# Altium PCB OpenPilot Atom.PcbDoc
Units mil, origin at the board's own origin, x right, y up, seen from the top; angles counter-clockwise.
Board outline 1181.1 x 665 mil, 4 copper layers (Top Layer, GND, PWR, Bottom Layer), stack 89.2 mil thick; 47 components, 47 nets, 207 pads, 69 vias.
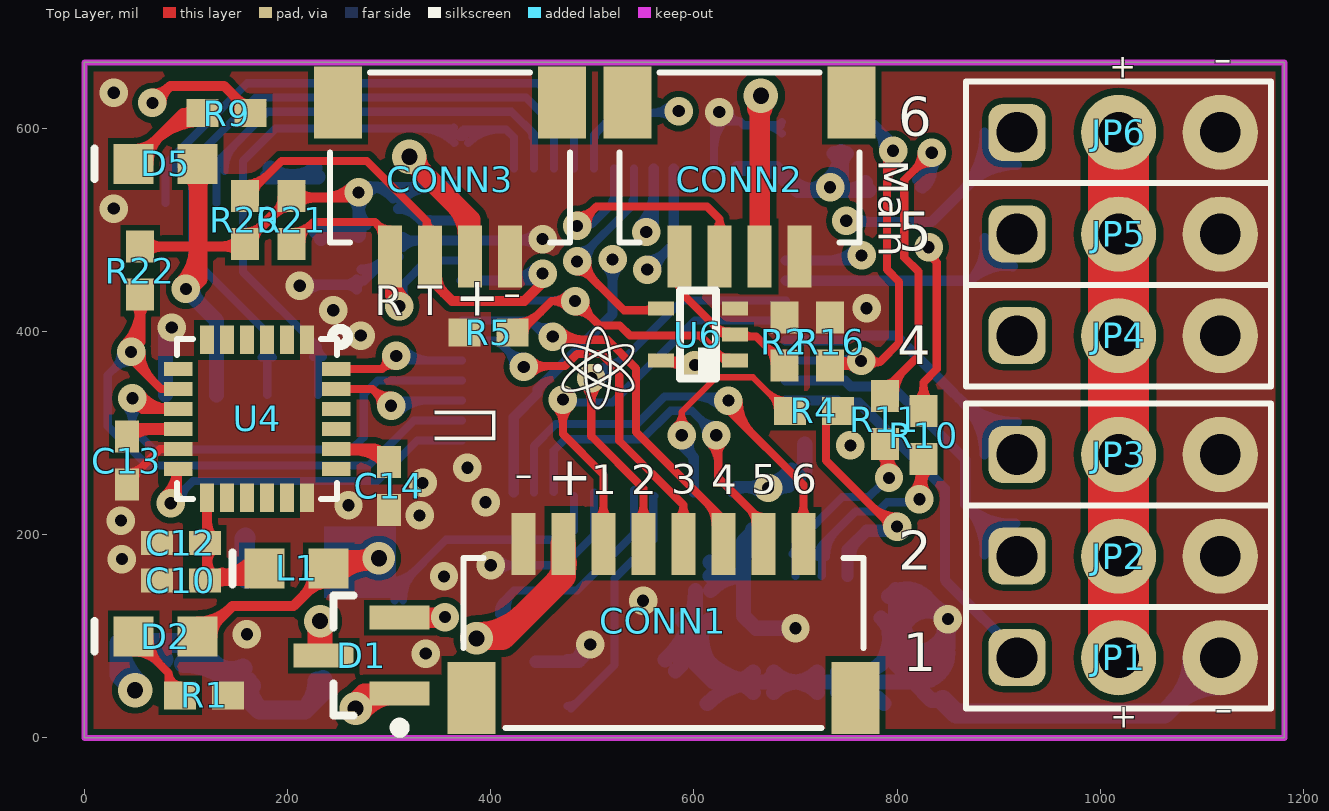
[diagram p0: Top Layer view]
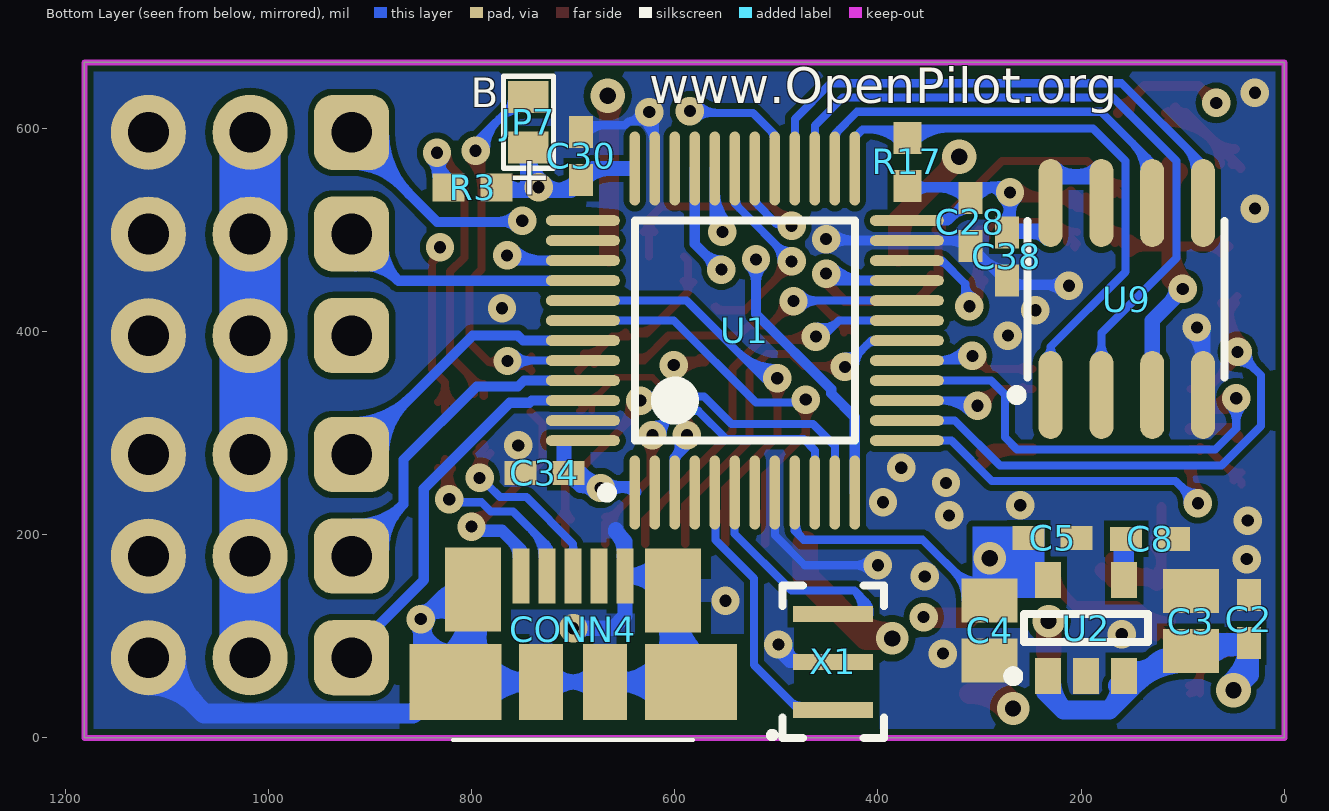
[diagram p1: Bottom Layer view, seen from below]
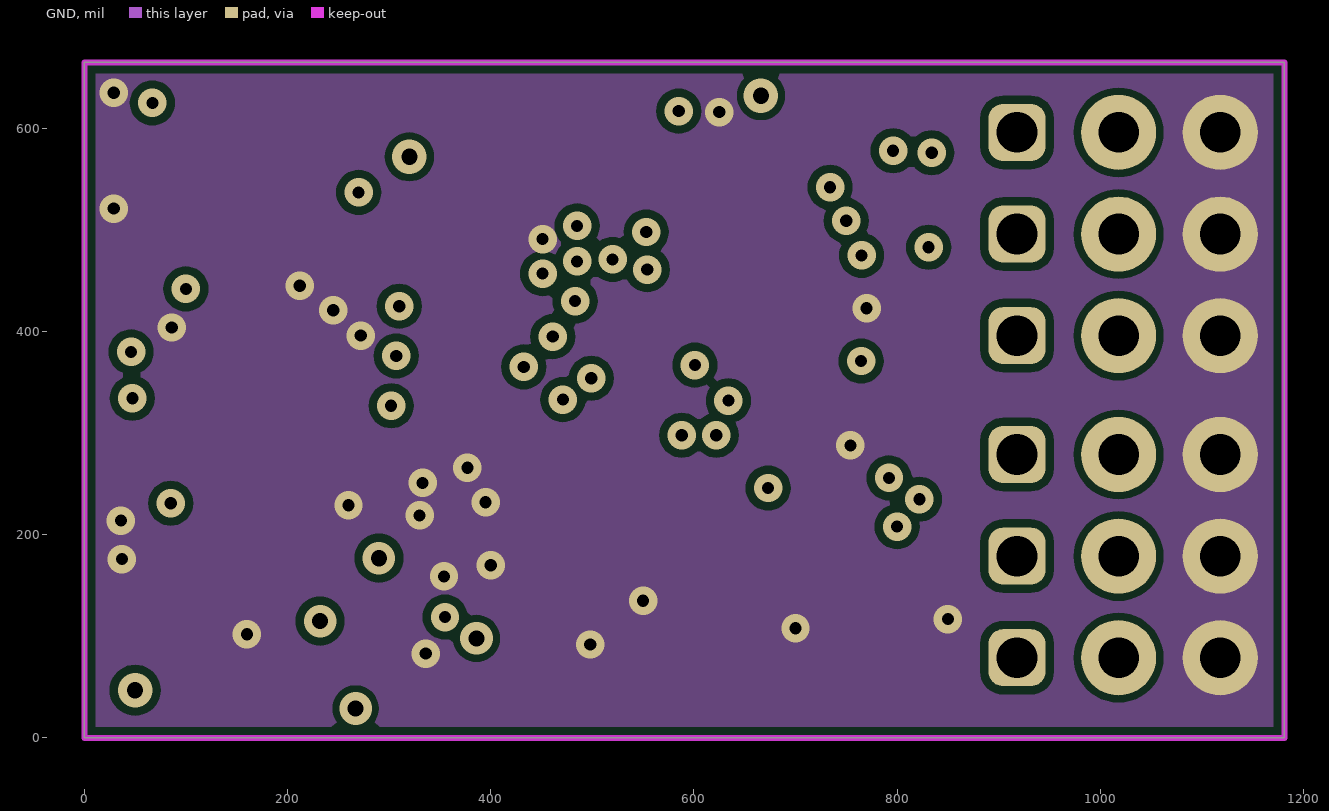
[diagram p2: GND]
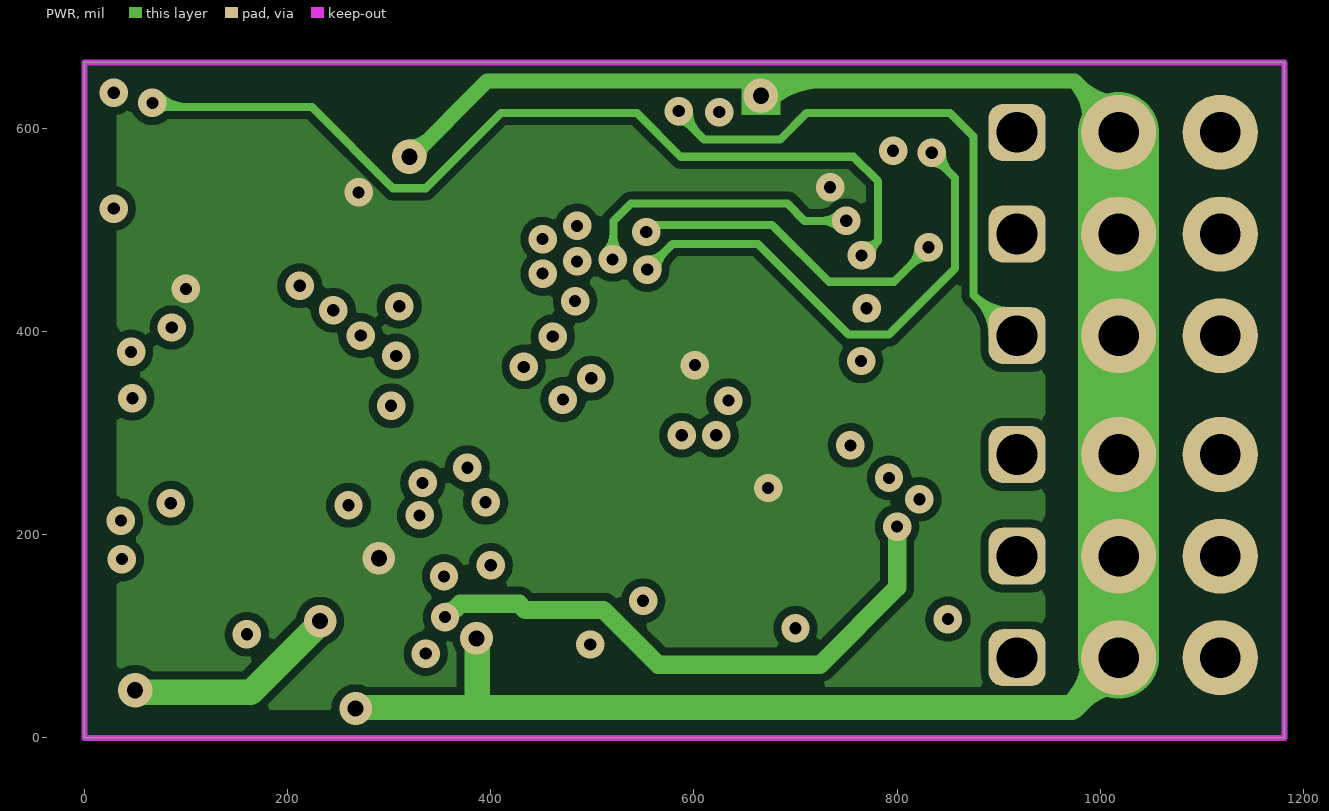
[diagram p3: PWR]
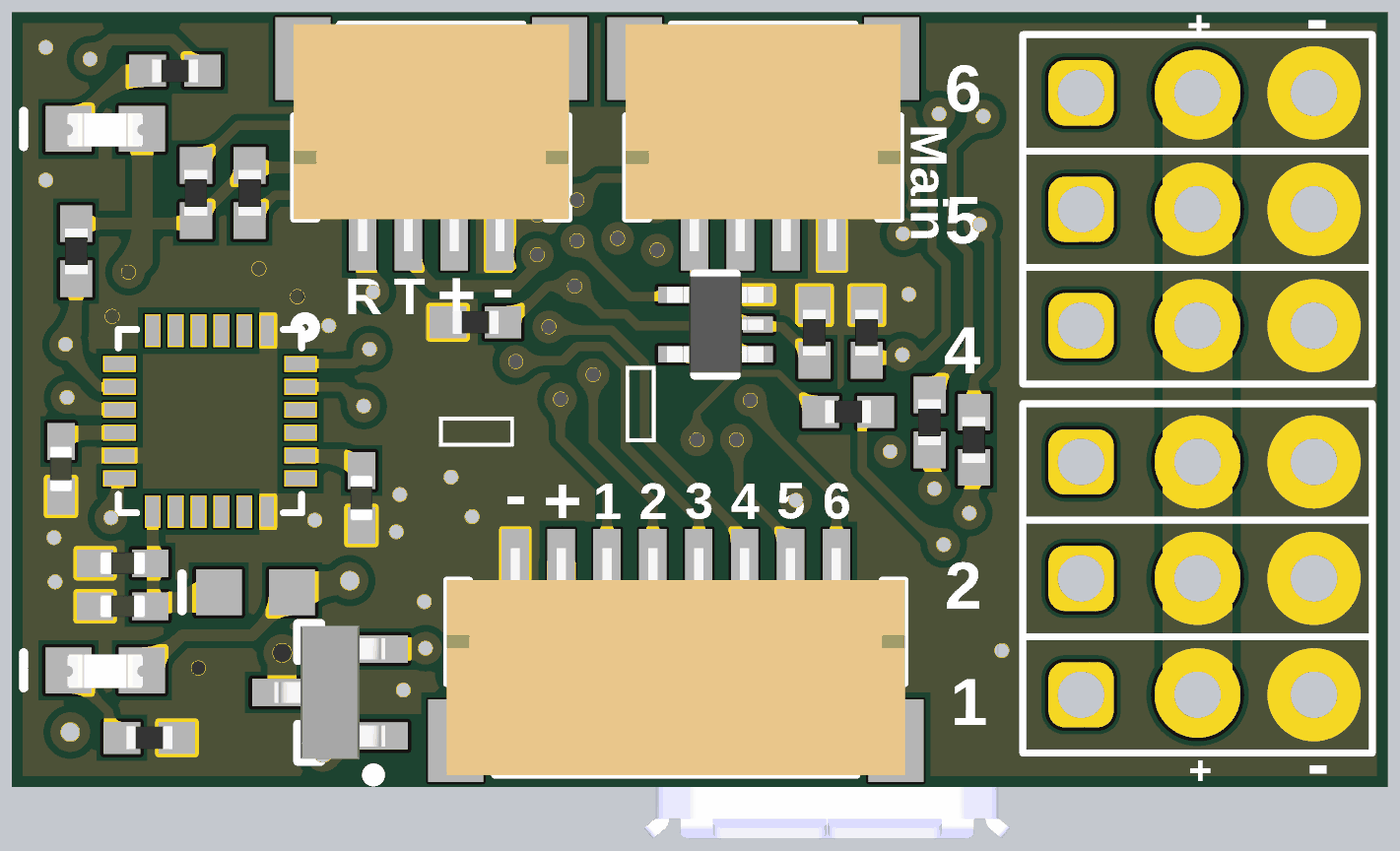
[diagram p4: 3D render of the assembled board from above, using the file's embedded part models]
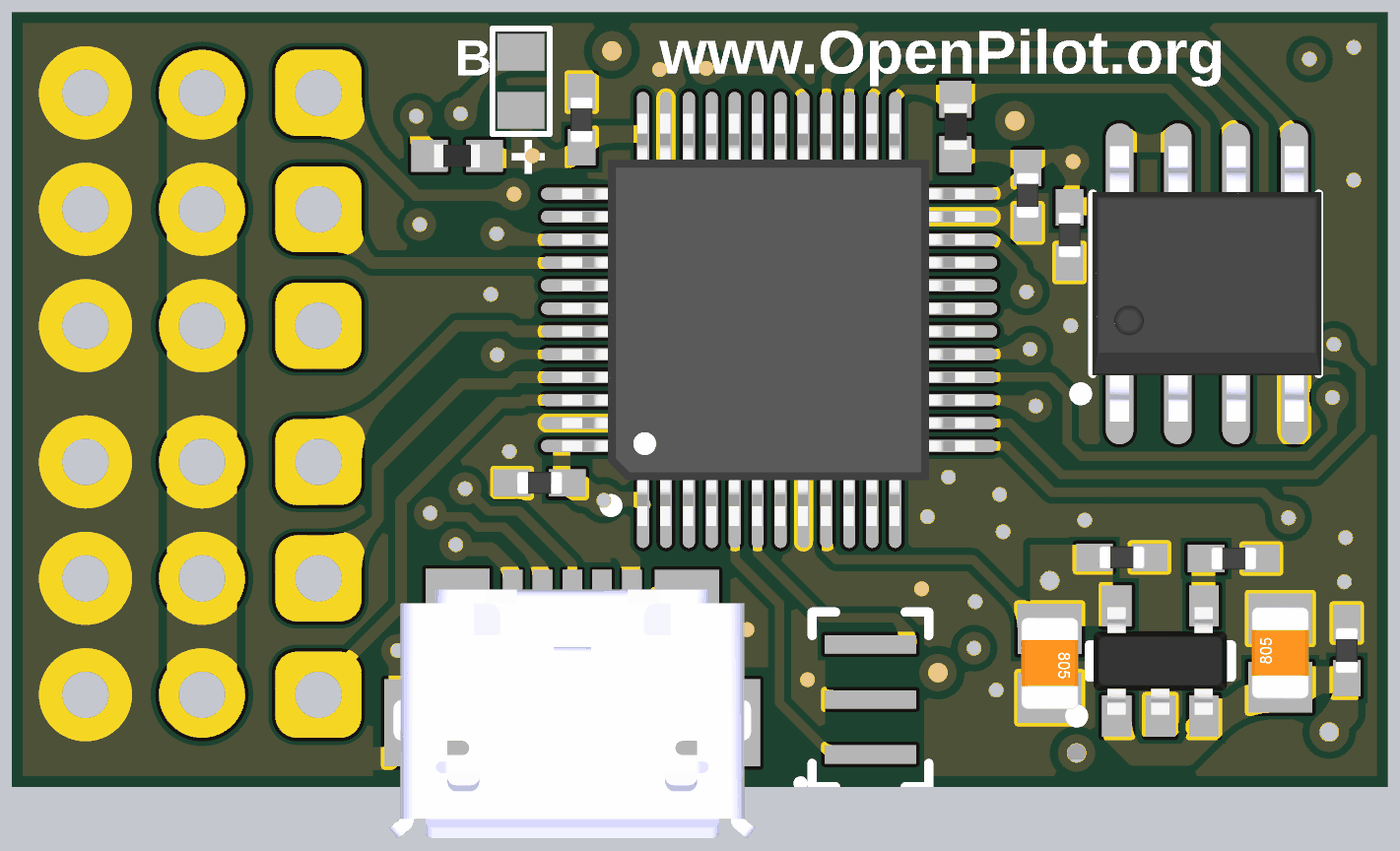
[diagram p5: 3D render of the assembled board from below, using the file's embedded part models]

## Layer stack, top to bottom
Top Solder: solder mask 0.4, Solder Resist, Dk 3.5
Top Layer: signal copper 1.4
Dielectric1: core 58.4, FR-4, Dk 4.8
GND: signal copper 1.4
Dielectric2: prepreg 12.6, FR-4, Dk 4.8
PWR: signal copper 1.4
Dielectric3: core 12.6, FR-4, Dk 4.8
Bottom Layer: signal copper 1.4
Bottom Solder: solder mask 0.4, Solder Resist, Dk 3.5

## Board outline
0,0 1181.1,0 1181.1,665 0,665

## Design rules (kind name [scope] priority, off if disabled: settings)
AcuteAngle [All] p1: minimum=6.00000000000000E+0001 checktracksonly=FALSE
Clearance "Clearance PWR Layer" [OnLayer('PWR')] p1: gap=8
Clearance "Clearance VCC_UNREG" [InNet('VCC_UNREG')] p2: gap=7
Clearance "Clearance GND Layer" [(InNamedPolygon('GND Layer - GND'))] p3: gap=8
Clearance "Small Part Clearance Poly" [HasFootprint('IMU-3000') vs (InNamedPolygon('Top Layer - GND'))] p4: gap=6
Clearance "Small Part Clearance" [HasFootprint('IMU-3000')] p5: gap=5
Clearance [All] p6: gap=6
ComponentClearance ComponentClearance_servo_headers [InComponent('JP1') or InComponent('JP2') or InComponent('JP3') or InComponent('JP4') or InComponent('JP5') or InComponent('JP6')] p1: gap=5 collisioncheckmode=3 verticalgap=10 showdistances=FALSE
ComponentClearance [All] p2: gap=10 collisioncheckmode=3 verticalgap=10 showdistances=FALSE
DiffPairsRouting [All] p1: maxlimit=20 minlimit=6 mostfreqgap=10 toplayer_minwidth=15 toplayer_maxwidth=15 toplayer_prefwidth=15 midlayer1_mingap=10 midlayer1_maxgap=10 midlayer1_minwidth=15 midlayer1_maxwidth=15 midlayer1_prefwidth=15 midlayer2_mingap=10 midlayer2_maxgap=10 midlayer2_minwidth=15 midlayer2_maxwidth=15 midlayer2_prefwidth=15 bottomlayer_minwidth=15 bottomlayer_maxwidth=15 bottomlayer_prefwidth=15 maxuncoupledlength=500
HoleSize [All] p1: absolutevalues=TRUE maxlimit=1000 minlimit=12 maxpercent=80.000 minpercent=20.000
MinimumAnnularRing [All] p1: minimumring=8
MinimumSolderMaskSliver MinimumSolderMaskSliver_MPU-6000 [InComponent('U4')] p1: minsoldermaskwidth=1
MinimumSolderMaskSliver [All] p2: minsoldermaskwidth=3
PlaneClearance [All] p1: clearance=15
PlaneConnect [All] p1: planeconnectstyle=Direct reliefexpansion=20 reliefentries=4 reliefconductorwidth=10 reliefairgap=10
PolygonConnect PolygonConnect_usb [InComponent('CONN4')] p1: connectstyle=Relief reliefconductorwidth=22 reliefentries=4 polygonreliefangle="90 Angle" airgapwidth=10
PolygonConnect [All] p2: connectstyle=Direct reliefconductorwidth=12 reliefentries=4 polygonreliefangle="90 Angle" airgapwidth=10
RoutingVias [All] p1: holewidth=15 width=31 viastyle="Through Hole" minholewidth=12 minwidth=28 maxholewidth=28 maxwidth=50
SilkToSilkClearance SilkToSilkClearance_text [IsText] p1: silktosilkclearance=0
SilkToSilkClearance [All] p2: silktosilkclearance=4
SilkToSolderMaskClearance SilkscreenOverComponentPads [IsPad] p1: minsilkscreentomaskgap=2 clearancetoexposedcopper=TRUE
SolderMaskExpansion [All] p1: expansion=3
Width [All] p1: maxlimit=400 minlimit=6 preferedwidth=10
22 further rules are at their usual default settings.

## Components (designator, comment, footprint, x,y, rotation, side; value= is the part's Value field where it differs from the comment)
C2 "10n" CAP402N 35,117 r90 bottom
C3 "Cap805" CAP805L 92,115 r90 bottom
C4 "Cap805" CAP805L 290,106 r270 bottom
C5 "10n" CAP402N 228,197 r180 bottom
C8 "10n" CAP402N 132,196 r180 bottom
C10 "1uF" CAP402N 95,155 r180 top
C12 "Cap402" CAP402N 95,192 r180 top
C13 "Cap402" CAP402N 42,273 r270 top
C14 "10n" CAP402N 300,248 r90 top
C28 "Cap402" CAP402N 309,508 r90 bottom
C30 "Cap402" CAP402N 692,573 r270 bottom
C34 "Cap402" CAP402N 728,261 r180 bottom
C38 "Cap402" CAP402N 273,474 r270 bottom
CONN1 "RC Input" "JST SH 8 Pin Side Entry" 570,10 r0 top
CONN2 "USART 1" "JST SH 4 Pin Side Entry" 645,655 r180 top
CONN3 "Flexi Port" "JST SH 4 Pin Side Entry" 360,655 r180 top
CONN4 "Micro USB B" Micro_USB 700,55 r180 bottom
D1 "BAT54C" SOT23-3N 273,81 r180 top
D2 "Green" LED603N 80,100 r0 top locked
D5 "Blue" LED603N 80,565 r0 top locked
JP1 "Servo out 1" "SIP3 - 0.1" 918,79 r0 top
JP2 "Servo out 2" "SIP3 - 0.1" 918,179 r0 top
JP3 "Servo out 3" "SIP3 - 0.1" 918,279 r0 top
JP4 "Servo out 4" "SIP3 - 0.1" 918,396 r0 top
JP5 "Servo out 5" "SIP3 - 0.1" 918,496 r0 top
JP6 "Servo out 6" "SIP3 - 0.1" 918,596 r0 top
JP7 "2 PAD Touch JMP" "TOUCH JMP 2PAD" 744,606 r180 bottom
L1 "FB 300mA" IND603N 209,167 r0 top
R1 "Res402" RES402N 118,42 r180 top
R2 "Res402" RES402N 689,390 r270 top
R3 "Res402" RES402N 799,542 r180 bottom
R4 "Res402" RES402N 718,322 r180 top
R5 "Res402" RES402N 398,399 r0 top
R9 "Res402" RES402N 140,615 r0 top
R10 "Res402" RES402N 826,298 r270 top
R11 "Res402" RES402N 788,313 r270 top
R16 "Res402" RES402N 734,390 r270 top
R17 "Res402" RES402N 371,567 r90 bottom
R20 "Res402" RES402N 158,510 r270 top
R21 "Res402" RES402N 204,510 r90 top
R22 "Res402" RES402N 55,460 r90 top
U1 "STM32F103CBT6" "STM32 48 Lead" 531,401 r90 bottom
U2 "LP2992-3.3" SOT23-5L 195,108 r90 bottom
U4 "MPU-6000" IMU-3000 170,314 r270 top
U6 "XOR" DCK-5 604,397 r180 top
U9 "Flash 16Mbits" SOIC8_N 155,432 r90 bottom
X1 "8Mhz Ceralock" "CERALOCK 8Mhz" 444,75 r90 bottom

## Footprints (in the part's own frame and the unit in brackets; to place one, negate y for a bottom-side part, rotate by r counter-clockwise, add the part's x,y. Pads: shape width x height; smd on the part's side, far side on the other; paste and mask are expansions set on the pad)
CAP402N [mm] "Chip Capacitor, Body 1.0x0.5mm, IPC Medium Density"
  rect 0.8x0.6 smd: 1(-0.6,0) 2(0.6,0)
  body extent -0.5,-0.25 0.5,0.25, height 0.6
CAP805L [mm] "Chip Capacitor, Body 2.0x1.3mm, IPC High Density"
  rect 1.1x1.4 smd: 1(-0.75,0) 2(0.75,0)
  body extent -1,-0.62 1,0.63, height 0.78
"CERALOCK 8Mhz" [mm] "Digikey 490-1195-1-ND"
  rect 0.4x2 smd: 1(-1.2,0) 2(1.2,0) 3(0,0)
  silkscreen extent -1.91,-1.27 1.91,1.58, body extent -1.78,-1.14 1.78,1.14, height 0.5
DCK-5 [mm] "SOT23-DCK, 5-Leads, Body 2.2x2.4mm (max), Pitch 0.65mm, IPC High Density"
  rect 0.65x0.35 smd mask+0.076: 1(-0.925,0.65) 2(-0.925,0) 3(-0.925,-0.65) 4(0.925,-0.65) 5(0.925,0.65)
  silkscreen extent -0.45,-1.1 0.45,1.1, body extent -1.05,-1.05 1.05,1.05, height 1
IMU-3000 [mm]
  rect 0.711x0.349 smd paste-0.03 mask+0.04: 1(-1.975,1.25) 2(-1.975,0.75) 3(-1.975,0.25) 4(-1.975,-0.25) 5(-1.975,-0.75) 6(-1.975,-1.25) 13(1.975,-1.25) 14(1.975,-0.75) 15(1.975,-0.25) 16(1.975,0.25) 17(1.975,0.75) 18(1.975,1.25)
  rect 0.349x0.711 smd paste-0.03 mask+0.04: 7(-1.25,-1.975) 8(-0.75,-1.975) 9(-0.25,-1.975) 10(0.25,-1.975) 11(0.75,-1.975) 12(1.25,-1.975) 19(1.25,1.975) 20(0.75,1.975) 21(0.25,1.975) 22(-0.25,1.975) 23(-0.75,1.975) 24(-1.25,1.975)
  silkscreen extent -2.25,-2 2,2.27, body extent -2,-2 2,2, height 0.95
IND603N [mm] "Chip Inductor, Body 1.6x0.8mm, IPC Medium Density"
  rect 1x1 smd: 1(-0.8,0) 2(0.8,0)
  silkscreen extent -1.6,-0.4 -1.6,0.4, body extent -0.87,-0.48 0.87,0.48, height 0.71
"JST SH 4 Pin Side Entry" [mm] "SM04B-SRSS-TB"
  rect 1.2x1.8 smd paste+0 mask+0.051: 0(-2.8,0.75) 0(2.8,0.75)
  rect 0.6x1.55 smd paste+0 mask+0.051: 1(-1.5,4.6) 2(-0.5,4.6) 3(0.5,4.6) 4(1.5,4.6)
  silkscreen extent -3,0 3,4.25, body extent -3,0 3,4.95, height 2.92
"JST SH 8 Pin Side Entry" [mm] "SM08B-SRSS-TB"
  rect 1.2x1.8 smd paste+0 mask+0.051: 0(-4.8,0.75) 0(4.8,0.75)
  rect 0.6x1.55 smd paste+0 mask+0.051: 1(-3.5,4.6) 2(-2.5,4.6) 3(-1.5,4.6) 4(-0.5,4.6) 5(0.5,4.6) 6(1.5,4.6) 7(2.5,4.6) 8(3.5,4.6)
  silkscreen extent -5,0 5,4.25, body extent -5,0 5,4.95, height 2.92
LED603N [mm] "Chip LED, Body 1.6x0.8mm, IPC Medium Density"
  rect 1x1 smd: 1(-0.8,0) 2(0.8,0)
  silkscreen extent -1.78,-0.38 -1.78,0.38, body extent -0.82,-0.38 0.82,0.34, height 0.68
Micro_USB [mm] "Digikey WM17141CT-ND"
  rect 2.3x1.9 smd: 0(-2.946,0) 0(2.946,0)
  rect 1.4x2.1 smd: 0(-2.5,2.311) 0(2.5,2.286)
  rect 1.1x1.9 smd: 0(-0.8,0) 0(0.8,0)
  rect 0.425x1.38 smd mask+0.064: 1(-1.3,2.65) 2(-0.65,2.65) 3(0,2.65) 4(0.65,2.65) 5(1.3,2.65)
  silkscreen extent -3,-1.45 3,-1.45, body extent -3.99,-2.53 3.99,2.9, height 2.69
RES402N [mm] "Chip Resistor, Body 1.1x0.5mm, IPC Medium Density"
  rect 0.8x0.7 smd: 1(-0.6,0) 2(0.6,0)
  body extent -0.5,-0.25 0.5,0.25, height 0.27
"SIP3 - 0.1" [mil] "Standard 0.1 3 Pin Header"
  rrect50% 56x56 / inner rrect50% 56x56 / far side rrect50% 74x74 hole 40: 1(0,0)
  round 74 hole 40: 2(100,0) 3(200,0)
  silkscreen extent -50,-50 250,50, body extent -47,-47 248,47, height 394
SOIC8_N [mm] "150 mil SOIC 8 IPC Medium Density"
  oval 2.2x0.6 smd: 1(-2.4,1.905) 2(-2.4,0.635) 3(-2.4,-0.635) 4(-2.4,-1.905) 5(2.4,-1.905) 6(2.4,-0.635) 7(2.4,0.635) 8(2.4,1.905)
  silkscreen extent -2.52,-2.44 1.96,2.88, body extent -3.01,-2.5 3.01,2.5, height 1.75
SOT23-3N [mm] "SOT23, 3-Leads, Body 2.9x1.3mm, Pitch 0.95mm, Lead Span 2.5mm, IPC Medium Density"
  rect 1.5x0.6 smd: 1(-0.95,0.95) 2(-0.95,-0.95) 3(0.95,0)
  silkscreen extent -1.07,-1.5 0.7,1.92, body extent -1.21,-1.45 1.21,1.45, height 0.99
SOT23-5L [mm] "SOT23, 5-Leads, Body 2.9x1.6mm, Pitch 0.95mm, Lead Span 2.8mm, IPC High Density"
  rect 0.9x0.65 smd mask+0.076: 1(-1.2,0.95) 2(-1.2,0) 3(-1.2,-0.95) 4(1.2,-0.95) 5(1.2,0.95)
  silkscreen extent -1.32,-1.55 0.35,1.95, body extent -1.17,-1.46 1.17,1.46, height 0.97
"STM32 48 Lead" [mm] "Thin QFP, 48-Leads, Body 7x7mm, Pitch 0.5mm, IPC Medium Density"
  oval 1.85x0.265 smd mask+0.076: 1(-4.05,2.75) 2(-4.05,2.25) 3(-4.05,1.75) 4(-4.05,1.25) 5(-4.05,0.75) 6(-4.05,0.25) 7(-4.05,-0.25) 8(-4.05,-0.75) 9(-4.05,-1.25) 10(-4.05,-1.75) 11(-4.05,-2.25) 12(-4.05,-2.75) 25(4.05,-2.75) 26(4.05,-2.25) 27(4.05,-1.75) 28(4.05,-1.25) 29(4.05,-0.75) 30(4.05,-0.25) 31(4.05,0.25) 32(4.05,0.75) 33(4.05,1.25) 34(4.05,1.75) 35(4.05,2.25) 36(4.05,2.75)
  oval 0.265x1.85 smd mask+0.076: 13(-2.75,-4.05) 14(-2.25,-4.05) 15(-1.75,-4.05) 16(-1.25,-4.05) 17(-0.75,-4.05) 18(-0.25,-4.05) 19(0.25,-4.05) 20(0.75,-4.05) 21(1.25,-4.05) 22(1.75,-4.05) 23(2.25,-4.05) 24(2.75,-4.05) 37(2.75,4.05) 38(2.25,4.05) 39(1.75,4.05) 40(1.25,4.05) 41(0.75,4.05) 42(0.25,4.05) 43(-0.25,4.05) 44(-0.75,4.05) 45(-1.25,4.05) 46(-1.75,4.05) 47(-2.25,4.05) 48(-2.75,4.05)
  silkscreen extent -4.17,-2.75 2.75,3.58, body extent -4.5,-4.49 4.5,4.51, height 1.56
"TOUCH JMP 2PAD" [mil] "Touch Jumper 2 Pad"
  rect 40x31.5 smd mask+0: 1(0,25) 2(0,-25)
  silkscreen extent -25,-45 25,45

## Part data
C2 C5 C8 C10 C14: library part Cap402, "Capacitor SMD"
C3 C4 C12 C13 C28 C30 C34 C38: "Capacitor SMD"
CONN1: library part "JST-SH 8-pin Side Entry Socket", "JST-SH 8-pin Side Entry Socket"
CONN2 CONN3: library part "JST-SH 4-pin Side Entry Socket", "JST-SH 4-pin Side Entry Socket"
CONN4: library part "USB Micro B SMT", "USB Micro B SMT Socket"
D1: "Dual Diode Command Cathode"
D2: library part "LED 603 Gr", "Green 603 LED"
D5: library part "LED 603 Bl", "Blue 603 LED"
JP1 JP2 JP3 JP4 JP5 JP6: library part "Hdr 3 Pin 0.1", "Header, 3-Pin, 0.1\""
JP7: "2 Pad Touch Jumper"
L1: library part FerriteBead_300mA, "Ferrite Bead 300mA"
R1 R2 R3 R4 R5 R9 R10 R11 R16 R17 R20 R21 R22: "Resistor SMD"
U1: "STM32 ARM-based 32-bit MCU with 128 Kbytes Flash, 48-pin LQFP, Industrial Temperature"
U2: library part LP2985-3.3, "3.3V 250mA LDO Regulator"
U4: library part MPU-3/6000, "Invensense MPU-3/6000,  3-axis Gyros & Accel on 6000"
U6: library part "XOR SN74LVC1G86DCKR", "XOR Gate SN74LVC1G86DCKR"
U9: library part "Flash 16Mb 75MHZ 8SOIC", "16Mbit SPI Flash Memory"
X1: library part CERALOCK8, "Ceralock 8Mhz with caps"

## Via types
v1: diameter 28, hole 12, Top Layer to Bottom Layer, tented both sides, 62 vias
v2: diameter 32, hole 16, Top Layer to Bottom Layer, tented both sides, 4 vias
v3: diameter 34, hole 16, Top Layer to Bottom Layer, tented both sides, 3 vias

## Nets (pads, with @x,y where several pads share a name; then routed paths per layer and width w, separated by ;. In a path a pad name is that pad's centre, name@x,y a point inside that pad or via, vN(x,y) a via of type N, cw(c..) or ccw(c..) an arc to the next point about the centre after c; other vN are vias at no path point)
BOOT: JP7.1 R16.2 U1.44 | length 705.3
  Top Layer w8: R16.2@740.92,361.43 cw(c761.6,340.74) v1@761.6,370 ; R16.2@740.92,375.26 ccw(c753.62,387.96) v1@753.62,370 ; R16.2@742.31,373.51 ccw(c748.62,377.44) 748.62,370 ; R16.2@743.49,365.99 cw(c748.62,364.71) 748.62,370 ; v1@755.03,374.02 cw(c743.52,377.66) 746.64,365.99 cw(c749.9,353.85) v1@758.07,363.4 ; v1@755.22,374.55 cw(c748.62,377.05) 748.62,370 ; v1@756,365.83 ccw(c748.62,361.38) 748.62,370 ; v1@772.45,364.85 cw(c783,356.62) 783,370 ; v1@773.37,375.75 ccw(c783,380.94) 783,370 ; 790,539.37 cw(c834.63,539.37) v1@803.07,570.93 ; 790,558.69 cw(c815.31,558.69) v1@797.41,576.59 ; v1@790,570 790,461 802,449 802,389 783,370 ; 748.62,370 783,370
  Bottom Layer w8: U1.44 764.09,371.47 v1(764.57,371) ; 739.28,371.47 cw(c739.28,345.72) v1@757.5,363.93 ; 741.56,371.47 ccw(c741.56,394) v1@757.5,378.07 ; JP7.1@745,627 755,627 796,586 v1(796,578) ; JP7.1@748.25,619.25 cw(c748.25,584.26) 773,609 ; JP7.1@760,631 ccw(c781.73,631) 766.36,615.64 ; 773.27,608.73 cw(c742.54,578) v1@786,578 ; 786.93,595.07 cw(c769.86,578) v1@794,578
CS_FLSH: R17.2 U1.25 U9.1 | length 709.4
  Bottom Layer w8: U9.1@225.2,375.17 ccw(c217.54,385) 230,385 ; U9.1 230,385 ; U9.1@234.8,375.17 cw(c242.46,385) 230,385 ; 329.5,600 cw(c329.5,551.09) R17.2@364.08,585.68 ; 348.82,600 cw(c348.82,570.41) R17.2@369.74,591.33 ; R17.2@363.62,601 362.62,600 188.34,600 156.19,567.85 156.19,458.81 230,385 ; R17.2@371,596.62 373.38,599 415,599 422.73,591.27 U1.25 ; R17.2@372.26,591.33 cw(c390.77,572.82) 390.77,599 ; R17.2@377.92,585.68 cw(c410.08,553.51) 410.08,599
GND: C2.2 C3.2 C4.2 C5.2 C8.2 C10.2 C12.2 C13.2 C14.1 C28.1 C30.1 C34.1 C38.2 CONN1.1 CONN2.1 CONN3.1 CONN4.0 CONN4.5 JP1.3 JP2.3 JP3.3 JP4.3 JP5.3 JP6.3 R1.1 R2.1 R5.1 R16.1 U1.8 U1.23 U1.35 U1.47 U2.2 U4.1 U4.11 U4.18 U6.3 U9.4 X1.3 | length 3907.7
  Top Layer w8: C13.2 42,252 74.47,284.47 U4.11 ; C13.2@42,261.13 ccw(c42,283.16) 57.58,267.58 ; C13.2@49.81,253.31 cw(c65.49,253.31) 54.4,264.4 ; U4.11@83.09,282.44 ccw(c78.18,277.53) 78.18,284.47 ccw(c78.18,291.41) U4.11@83.09,286.51
  Bottom Layer w8: v1(400,170) 472,170 501.47,199.47 U1.8 ; v1@407.07,162.93 cw(c424.14,145.86) 424.14,170 cw(c424.14,194.14) v1@407.07,177.07 ; U1.35 v1@619.58,610.58 ; U1.35@619.58,578.78 cw(c662.22,578.78) v1@632.07,608.93 ; 619.58,598.1 cw(c642.9,598.1) v1@626.41,614.59 ; v1(625,616) 634.13,606.87 645.57,606.87 ; v1@626.99,616.14 ccw(c636.97,616.87) 636.97,606.87 ; v1@634.97,616.72 ccw(c645.57,617.49) 645.57,606.87 ; 667.25,603 cw(c667.25,575.81) C30.1@686.48,595.04 ; CONN4.0@668.5,57 CONN4.0@678,66.5 ; 679.04,603 ccw(c679.04,613.52) C30.1@686.48,606.08 ; C30.1@685.62,603 649.44,603 645.57,606.87
  Bottom Layer w10: v1@212,446 268.62,446 C38.2 275,450.38 C28.1 314.2,489.58 U1.23 v1@449.58,489.58 ; v1@218.36,438.64 cw(c236.14,420.86) 236.14,446 ; v1@218.36,451.36 ccw(c231.31,464.31) 231.31,446 ; 255.49,446 ccw(c255.49,463.95) C38.2@268.18,451.26 ; 257.62,446 cw(c257.62,431.06) C38.2@268.18,441.62 ; C38.2@273,461.13 ccw(c273,491.9) 294.76,470.14 ; 290.65,466.03 cw(c309,447.68) C28.1@309,473.63 ; C28.1@313.82,483.5 cw(c328.5,468.81) 328.5,489.58 ; C28.1@313.82,493.13 ccw(c322.38,501.7) 322.38,489.58 ; 425.85,489.58 ccw(c425.85,516.15) v1@444.64,497.36 ; 432.69,489.58 cw(c432.69,472.69) v1@444.64,484.64
  Bottom Layer w12: X1.3 487,75 ; X1.3@475.5,76.87 ccw(c475.5,109.17) v1@498.33,86.33 ; X1.3@481.32,76.51 ccw(c472.63,91.55) v1@490,91.86 ; v1@490.41,89.47 cw(c477.01,84.99) 487,75 ; v1@501,89 487,75
  Bottom Layer w15: U9.4 v1@80,403 ; U9.4@80,373.82 cw(c116.18,373.82) v1@90.6,399.4 ; CONN4.0@571.67,77.05 ccw(c509.42,144.99) 601.57,144.99 601.57,72.57 619.15,55 668.5,55 731.5,55 CONN4.0@816,55 ; CONN4.0@581.81,65.99 ccw(c540.65,110.91) CONN4.0@601.57,110.91 ; CONN4.0@583,83.55 ccw(c571.44,120.72) 609.04,110.65 ccw(c652.53,98.99) CONN4.0@616.08,72.55 ; CONN4.0@587.39,117.04 cw(c553.15,82.79) 601.57,82.79 cw(c650,82.79) CONN4.0@615.76,117.04 ; CONN4.0@601.57,103.77 ccw(c640.64,103.77) 613.02,76.14 ccw(c664.06,127.19) 664.06,55 ccw(c664.06,-17.19) CONN4.0@613.02,33.86 ; CONN4.0@615.76,172.96 ccw(c648.67,205.88) CONN4.5@648.67,159.33 ; CONN4.0@615.91,159.33 CONN4.5 ; CONN4.0@616.28,145.14 cw(c648.82,114.94) CONN4.5 ; CONN4.5@649.68,178.24 cw(c678.61,181.97) 657.98,202.6 ; 657.98,204.98 657.98,202.6 ; CONN4.0@658.5,44.99 ccw(c634.33,20.83) 634.33,55 ccw(c634.33,89.17) CONN4.0@658.5,65.01 ; CONN4.0@678.51,44.99 cw(c702.67,20.83) 702.67,55 cw(c702.67,89.17) CONN4.0@678.51,65.01 ; v1@695.4,103.4 ccw(c684.31,92.31) 684.31,108 ccw(c684.31,123.69) v1@695.4,112.6 ; v1(700,108) 661,108 648.82,120.18 CONN4.5 ; CONN4.0@721.49,44.99 ccw(c697.33,20.83) 697.33,55 ccw(c697.33,89.17) CONN4.0@721.49,65.01 ; CONN4.0@741.5,44.99 cw(c765.67,20.83) 765.67,55 cw(c765.67,89.17) CONN4.0@741.5,65.01 ; CONN4.0@783.93,72.56 ccw(c746.96,99.39) 791.08,111.21 ccw(c829.88,121.61) CONN4.0@817.41,83.42 ; CONN4.0@784.24,118.04 cw(c750,83.79) 798.43,83.79 cw(c846.85,83.79) CONN4.0@812.61,118.04 ; CONN4.0@786.98,33.86 ccw(c735.94,-17.19) 735.94,55 ccw(c735.94,127.19) 786.98,76.14 ccw(c759.36,103.77) 798.43,103.77 ; CONN4.0@791.62,139.47 cw(c809.57,120.35) 828.11,138.89 ; CONN4.0@798.43,111.53 ccw(c860.77,111.53) CONN4.0@818.28,65.91 ; CONN4.0@801,137 830,137 ; CONN4.0@801.89,128.53 cw(c820.17,109.06) 839.05,127.95 ; CONN4.0@812.16,117.6 cw(c830.77,97.77) v1(850,117) ; CONN4.0@814.16,144.67 ccw(c830,157.2) 830,137 ; CONN4.0@817.92,127.5 cw(c830,124.57) 830,137 ; CONN4.0@820.86,84.75 ccw(c817.59,117) v1(850,117) ; CONN4.0@822.37,69.83 ccw(c819.27,100.4) 850,100.4 ; CONN4.0@823.88,54.9 ccw(c820.95,83.8) CONN4.0@850,83.8 ; CONN4.0@828.5,76.88 cw(c892.87,146) 798.43,146 798.43,72.57 CONN4.0@816,55 ; 830.04,133.15 cw(c815.35,107.72) v1@843.72,115.32 ; v1@843.5,117 ccw(c827.81,117) 838.9,128.1 ccw(c850,139.19) v1@850,123.5 ; v1@844.37,113.75 cw(c830.78,105.9) 845.94,101.84 cw(c861.1,97.78) v1@853.25,111.37 ; CONN4.0@845,37 834,37 CONN4.0@816,55 ; v1@845.4,112.4 cw(c834.31,101.31) 850,101.31 cw(c865.69,101.31) v1@854.6,112.4 ; CONN4.5 648.82,193.43 657.98,202.6 ; CONN4.0@816,55 850,89 v1(850,117) ; 830,137 v1(850,117)
  Bottom Layer w20: CONN4.0@845,37 858,24 1063,24 JP1.3 ; JP1.3@1091,79 cw(c1025.82,79) 1071.91,32.91 cw(c1118,-13.18) JP1.3@1118,52
  other v1: 336,83 498,92 160,102 550,135 354,159 37,176 36,214 330,219 260,229 395,232 333,251 377,266 754,288 272,396 86,404 245,421 770,423 212,445 451,491 29,521 29,635
GYRO_CS#: R22.1 U1.14 U4.8 | length 788.7
  Top Layer w8: v1@45,374 75.47,343.53 U4.8 ; R22.1@46.38,435 R22.1@55,426.38 ; v1@48,380 ccw(c69.73,380) 54.36,364.64 ; v1@56,380 ccw(c97.04,380) 68.02,350.98 ; U4.8@83.09,341.49 ccw(c78.18,336.59) 78.18,343.53 ccw(c78.18,350.47) U4.8@83.09,345.56
  Top Layer w10: v1@39.64,386.36 ccw(c2.54,423.46) R22.1@55,423.46 ; v1@41,374 v1@45,374 ; v1@46,378 46,381 55,390 R22.1@55,426.38 ; v1@46.71,379.29 ccw(c26.69,399.31) 55,399.31 ; R22.1@48.79,428.2 cw(c33.8,413.21) 55,413.21 cw(c76.2,413.21) R22.1@61.21,428.2
  Bottom Layer w8: v1@36,380 cw(c11.86,380) 28.93,362.93 cw(c46,345.86) v1@46,370 ; v1(46,380) 23,357 23,307 62,268 279.94,268 324.36,312.42 U1.14
GYRO_INT#: U1.13 U4.12 | length 424.9
  Top Layer w10: v1@79.15,237.84 ccw(c57.2,263.54) U4.12@91,263.54 ; v1@85,229 91,235 U4.12@91,263.54 ; 91,257.26 cw(c99.77,257.26) U4.12@93.57,263.46 ; U4.12 U4.12@91,263.54
  Bottom Layer w8: v1(85,231) 107,253 288,253 327.73,292.73 U1.13 ; v1@85,241 ccw(c85,265.14) 102.07,248.07 ccw(c119.14,231) v1@95,231
INV: R5.2 U1.20 U6.1 | length 523.1
  Top Layer w8: R5.2@423.59,400.78 ccw(c423.59,418.14) R5.2@435.86,405.86 ; R5.2@423.59,408.78 ccw(c423.59,445.45) 449.52,419.52 ; R5.2@433.37,399 cw(c443.92,399) R5.2@436.46,406.46 ; R5.2@435,405 460,430 ; v1@475.79,423.16 ccw(c460,408.36) 460,430 ; v1@475.79,436.84 cw(c460,451.64) 460,430 ; v1@482,426 484.5,428.5 507,406 527,406 537,396 606,396 630.2,371.8 U6.1@633.8,371.8 ; v1@483.08,420 cw(c483.08,396.06) 500.01,412.99 ; v1(483.08,430) 460,430 ; v1@493.08,430 ccw(c517.43,430) 500.21,412.79 ; 622.88,379.12 ccw(c634.51,390.74) U6.1@634.51,374.3
  Bottom Layer w8: U1.20 v1@485,430.53 ; 457.67,430.53 cw(c457.67,404.58) v1@476.01,422.93 ; 460.22,430.53 ccw(c460.22,452.87) v1@476.01,437.07
LED_BLUE: R9.2 U1.39 | length 1254.3
  Top Layer w10: v1@64,621 84.78,641.78 137.51,641.78 163.62,615.67 R9.2 ; v1@67,634 ccw(c67,658.14) 84.07,641.07 ; v1@76,625 cw(c95.31,625) 81.66,638.66 ; 144.8,634.49 cw(c125.31,615) R9.2@152.87,615 ; R9.2@151.17,628.12 ccw(c161.65,638.61) R9.2@161.65,623.78
  PWR w8: v1@62,621 224,621 304,541 336,541 410,615 544,615 587,572 757,572 781,548 781,489 ; v1@68.41,626.41 ccw(c81.49,639.49) 81.49,621 ccw(c81.49,610.51) v1@74.07,617.93 ; v1@74.07,632.07 ccw(c100.8,658.8) 100.8,621 ; v1@767.01,484.8 ccw(c770.1,499.9) 781,489 ; v1@770,478 781,489 ; v1@775,475 cw(c794.31,475) 780.66,488.66
  Bottom Layer w10: U1.39 v1@758.9,469.9 ; 730.96,469.9 ccw(c730.96,509.04) v1@758.64,481.36
  other v1: 765,475 67,625
MISO: U1.16 U4.9 | length 563.3
  Top Layer w10: v1@46.44,333.82 ccw(c64.6,345.7) 64.6,324 ; v1@47.27,332.37 49,332.37 57.37,324 ; v1@50,325.79 cw(c52.21,318.84) 57.37,324 ; v1@54.81,339.3 ccw(c83.08,357.79) 83.08,324 57.37,324 ; v1@55.74,331.31 ccw(c62.31,328.94) 57.37,324
  Bottom Layer w8: v1@40.2,327.3 cw(c23.13,310.23) 47.27,310.23 cw(c71.42,310.23) v1@54.35,327.3 ; v1(47.27,334.37) 47.27,304.73 68,284 263,284 275,296 275,338 288.79,351.79 U1.16
MOSI: U1.17 U4.24 | length 212.9
  Top Layer w8: U4.24 293.21,363.21 ; U4.24@256.91,361.18 cw(c261.82,356.27) 261.82,363.21 cw(c261.82,370.15) U4.24@256.91,365.25 ; v1@297.09,374.67 cw(c283.57,372.86) 293.21,363.21 ; v1@304.52,366.31 ccw(c301.59,354.84) 293.21,363.21 ; v1@307,374 304,374 293.21,363.21
  Bottom Layer w8: v1(307,376) 311.53,371.47 U1.17 ; v1@308.41,377.41 ccw(c322.76,391.76) 322.76,371.47 ; v1@314.07,383.07 ccw(c342.07,411.07) U1.17@342.07,371.47
NetC8_1: C8.1 U2.4 | length 41.2
  Bottom Layer w20: C8.1@158.62,197 158,196.38 158,158.84 U2.4@160,156.84
NetC10_1: C10.1 C12.1 L1.1 U4.13 | length 301.4
  Top Layer w10: C10.1@117.74,159.82 ccw(c110.39,167.17) 120.79,167.17 ; C12.1@117.74,187.18 cw(c110.39,179.83) 120.79,179.83 ; C12.1@117.74,196.82 ccw(c110.39,204.17) 120.79,204.17 ; C10.1@120.79,152.17 U4.13@120.79,227.24 ; 120.79,171.28 cw(c143.28,171.28) C12.1@127.38,187.18 ; 120.79,175.72 ccw(c143.28,175.72) C10.1@127.38,159.82 ; 120.79,212.72 ccw(c143.28,212.72) C12.1@127.38,196.82
  Top Layer w15: C10.1 C10.1@120.79,155 ; C10.1@120.79,159 122.79,157 166.5,157 L1.1@168.5,155 ; C10.1@123.94,157 ccw(c123.94,220.56) L1.1@168.89,175.62 ; C10.1@125.61,151.95 cw(c137.8,139.76) 137.8,157 ; C10.1@126.29,152.84 cw(c139.96,144.95) 135.87,160.2 ; L1.1@160.16,157 ccw(c160.16,184.35) L1.1@179.49,165.01
NetC13_1: C13.1 U4.10 | length 63.4
  Top Layer w12: C13.1@46.11,296.45 cw(c64.72,277.84) 64.72,304.16 ; C13.1@49.54,304.16 U4.10
NetC14_2: C14.2 U4.20 | length 123.6
  Top Layer w12: U4.20@247.76,284 283.56,284 ; 265.59,284 cw(c265.59,241.15) C14.2@295.89,271.45 ; C14.2@294.25,274.73 ccw(c283.56,273.2) 283.56,284 ; C14.2@297.9,280.98 cw(c293.05,293.49) 283.56,284 ; C14.2@300,267.56 283.56,284
NetCONN2_4: CONN2.4 R2.2 U6.2 | length 249.8
  Top Layer w8: CONN2.4@581.72,448.62 cw(c575.52,438.97) 587,438.97 cw(c602.06,438.97) CONN2.4@591.45,449.65 ; CONN2.4@591,474 587,470 587,439 627.91,398.09 U6.2@633.09,398.09 ; 620.17,405.83 ccw(c634.51,420.17) U6.2@634.51,399.89 ; U6.2@646,395 661.38,395 R2.2@695,361.38 ; U6.2@648.37,399.04 ccw(c658.13,408.8) 658.13,395 ; 670.65,385.73 ccw(c689,404.07) R2.2@689,378.13 ; 672.99,383.39 cw(c657.95,368.35) R2.2@679.22,368.35
NetCONN4_2: CONN4.2 R10.2 | length 370.9
  Top Layer w8: v1@814.93,242.07 ccw(c797.86,259.14) 822,259.14 ccw(c846.14,259.14) v1@829.07,242.07 ; v1@817.03,243.68 ccw(c807.01,261.21) 826.51,255.98 ccw(c842.24,251.77) v1@829.7,241.38 ; R10.2@819.08,265.49 cw(c812.05,258.46) 822,258.46 cw(c839.95,258.46) R10.2@827.26,271.15 ; v1(822,235) 822,270.38 R10.2 ; v1@822,239.14 cw(c859.27,239.14) R10.2@832.92,265.49
  Bottom Layer w8: CONN4.2@721.96,178.13 cw(c740.85,178.13) 727.49,191.49 ; CONN4.2@722.5,181.22 ccw(c714.06,189.66) 726,189.66 ; CONN4.2 726,159.74 726,190 759,223 781.06,223 790.06,232 820,232 v1@824,236 ; 726,187.68 ccw(c735.14,187.68) CONN4.2@728.68,181.22 ; CONN4.2@729.96,178.13 cw(c768.17,178.13) 741.15,205.15
NetCONN4_3: CONN4.3 R11.2 | length 300.6
  Top Layer w8: R11.2@781.34,280.25 cw(c758.51,255.75) v1@792,255.75 ; R11.2@786.79,286.11 cw(c775.63,274.13) R11.2@792,274.13 ; R11.2 792,285.38 v1(792,256) ; 792,273.46 cw(c801.95,273.46) R11.2@794.92,280.49 ; v1@794.48,265.69 cw(c796.89,275.12) 787.48,272.6 cw(c777.96,270.05) 784.93,263.07 ccw(c767.86,280.14) 792,280.14 ccw(c816.14,280.14) v1@799.07,263.07
  Bottom Layer w8: CONN4.3@696.91,181.22 ccw(c689.46,188.67) 700,188.67 ccw(c710.54,188.67) CONN4.3@703.09,181.22 ; CONN4.3 700,191 746,237 772,237 784,249 v1@784,251
NetD2_1: D2.1 R1.2 | length 181
  Top Layer w8: D2.1@48.5,84.32 cw(c48.5,50.08) 72.71,74.29 ; D2.1 48.5,98.5 83,64 ; D2.1@56.19,100 ccw(c78.37,100) D2.1@62.69,84.31 ; D2.1@64.19,100 ccw(c105.69,100) 76.34,70.66 ; R1.2@83,44 83,64 ; R1.2@83,54.83 ccw(c94.17,54.83) R1.2@92.65,43.76 ; R1.2@93.74,51.69 cw(c95.43,64) 83,64
NetD5_1: D5.1 R9.1 | length 258.3
  Top Layer w10: D5.1@43,561 97,615 ; D5.1 D5.1@51,565 ; D5.1@48.5,579.68 ccw(c48.5,611.51) 71.01,589.01 ; D5.1@63.19,565 cw(c102.27,565) 74.64,592.64 ; 69.7,587.7 cw(c114.41,542.99) R9.1@114.41,606.22 ; 86.77,604.77 cw(c114.41,577.14) R9.1@114.41,616.22 ; R9.1@107.35,609.78 ccw(c97,602.13) 97,615 ; R9.1@107.35,620.22 cw(c97,627.87) 97,615 ; R9.1 97,615
NetR3_1: R3.1 R11.1 U1.33 | length 1207.3
  Top Layer w8: R11.1 788,343.06 821,376.06 821,459 807,473 807,549 v1@833,575 ; R11.1@788,348.37 ccw(c788,361.19) R11.1@797.07,352.13 ; R11.1@797.78,338.59 cw(c832.18,338.59) 807.85,362.91 ; v1@824,576 cw(c799.86,576) 816.93,558.93 cw(c834,541.86) v1@834,566
  PWR w8: v1(554,461) 579,486 663,486 752,397 792,397 857,462 857,551 v1@835,573 ; v1@554,471 ccw(c554,495.14) 571.07,478.07 ccw(c588.14,461) v1@564,461 ; v1@834,566 cw(c834,546.69) 847.66,560.34 ; v1@844,576 ccw(c872.97,576) 852.49,555.51
  Bottom Layer w10: v1@554,460 580.21,486.21 U1.33 ; v1@554,470 ccw(c554,494.14) 571.07,477.07 ; v1@563,461 cw(c582.31,461) 568.66,474.66 ; R3.1@819.72,549.3 ccw(c801.91,576) v1(834,576) 834,553.38 R3.1 ; R3.1@825.27,540.98 ccw(c814.38,557.31) 834,557.31 ; v1@827.3,569.99 cw(c819.24,562.76) 829.7,559.95 cw(c840.16,557.15) v1@836.8,567.45 ; v1@827.64,569.64 cw(c812.27,554.27) 834,554.27 cw(c855.73,554.27) v1@840.36,569.64
NetR4_2: R4.2 U1.3 | length 327.8
  Top Layer w6: v1@581.1,306.56 ccw(c569.46,321) 588,321 ; v1(588,298) 588,321 ; v1@594.9,306.56 cw(c606.54,321) 588,321 ; 671.6,341.4 ccw(c692.41,362.21) R4.2@692.41,332.78 ; 675,338 cw(c659.01,322) R4.2@681.63,322 ; R4.2@681.84,331.16 ccw(c692.41,341.72) R4.2@692.41,326.78 ; R4.2 691,322 658,355 622,355 588,321
  Bottom Layer w10: v1@588,295 588,287.9 U1.3@599.9,276 ; v1@596.29,294.49 ccw(c611.82,287.93) U1.3@599.9,276 ; 597.23,278.67 cw(c591.31,272.75) U1.3@599.68,272.75 ; U1.3 U1.3@599.9,276
NetR10_1: R10.1 U1.32 | length 692.6
  Top Layer w8: R10.1@819.08,330.51 ccw(c802.39,347.2) 826,347.2 ccw(c849.61,347.2) R10.1@832.92,330.51 ; R10.1 826,350 839,363 839,468 ; v1@827.2,479.8 839,468 ; v1@838.64,476.55 ccw(c843.47,472.47) 839,468
  PWR w6: v1(553,498) v1@560,505
  PWR w8: v1@560,505 677,505 733,449 797,449 v1(831,483) ; v1@821,483 cw(c796.86,483) 813.93,465.93 cw(c831,448.86) v1@831,473
  Bottom Layer w10: v1@546.64,504.36 ccw(c513.1,537.9) U1.32@560.53,537.9 ; v1@552,498 560.53,506.53 U1.32 ; v1@553.71,497.29 ccw(c537.24,513.76) 560.53,513.76
NetU1_5: U1.5 X1.1 | length 254.6
  Bottom Layer w8: X1.1@475.5,31.63 ccw(c475.5,46.44) 485.97,35.97 ; X1.1@479,29 522,72 522,157 560,195 560,237 U1.5@561,238
NetU1_6: U1.6 X1.2 | length 261.5
  Bottom Layer w8: X1.2@408.46,121.45 cw(c422.56,124.23) 412.4,134.4 ; X1.2@412,120 411,121 411,133 ; X1.2@414.83,125.34 cw(c420.57,133) 411,133 ; X1.2@416.3,122.99 cw(c440.28,127.72) 423,145 ; U1.6@541,244 541,201 485,145 423,145 ; 411,133 423,145
NetU1_26: U1.26 U9.6 | length 468.7
  Bottom Layer w8: U9.6@129.81,557.98 cw(c148.71,557.98) 135.35,571.35 ; U9.6 130,566 180.37,616.37 420.63,616.37 442.42,594.58 U1.26 ; U9.6@137.81,557.98 cw(c176.02,557.98) 149,585 ; 438.27,598.73 cw(c431.18,591.65) U1.26@441.2,591.65
NetU1_27: U1.27 U9.2 | length 726.2
  Bottom Layer w8: U9.2@174.48,374.53 ccw(c161.14,387.87) 180,387.87 ccw(c198.86,387.87) U9.2@185.52,374.53 ; U9.2 180,398.77 106.19,472.58 106.19,567.85 168.71,630.37 434.63,630.37 462.1,602.9 U1.27
NetU1_28: U1.28 U9.5 | length 562.8
  Bottom Layer w8: U9.5 80,564.29 160.08,644.37 446.63,644.37 481.79,609.21 U1.28 ; U9.5@87.81,557.98 cw(c121.88,557.98) 97.79,582.08
S1_IN: CONN1.3 U1.42 | length 479.8
  Top Layer w8: v1@463.93,325.93 cw(c446.86,308.86) 471,308.86 cw(c495.14,308.86) v1@478.07,325.93 ; v1@471,331 471,299 510.95,259.05 CONN1.3 ; CONN1.3@505.42,215.33 ccw(c492.09,228.66) 510.94,228.66 ccw(c529.8,228.66) CONN1.3@516.47,215.33
  Bottom Layer w8: v1(471,333) 474,330 520,330 601,411 U1.42@692,411
S1_OUT: JP1.1 U1.46 | length 396.5
  Bottom Layer w10: U1.46 741,332.1 743.1,330 762.36,330 847,245.36 847,155.36 924.36,78 JP1.1@929,78
S2_IN: CONN1.4 U1.41 | length 546.9
  Top Layer w8: v1@491.93,346.93 cw(c474.86,329.86) 499,329.86 cw(c523.14,329.86) v1@506.07,346.93 ; v1(499,354) 499,297 550.32,245.68 CONN1.4 ; CONN1.4@544.79,215.33 ccw(c531.46,228.66) 550.31,228.66 ccw(c569.17,228.66) CONN1.4@555.84,215.33
  Bottom Layer w8: v1(499,354) 512,354 588.53,430.53 U1.41 ; v1@499,356 ccw(c499,392.21) 524.61,366.61 ; v1@499,364 ccw(c499,419.53) 538.26,380.26
S2_OUT: JP2.1 U1.45 | length 519.9
  Bottom Layer w10: U1.45 748.42,351.79 754.21,346 795,346 867,274 867,230 ; JP2.1@886.04,180.59 ccw(c820.85,183.84) 867,230 ; JP2.1@896.03,180.1 ccw(c851.21,182.33) 882.94,214.06 ccw(c914.67,245.79) JP2.1@916.9,200.97 ; JP2.1@916.41,210.96 cw(c913.16,276.15) 867,230 ; JP2.1@929,179 JP2.1 867,230
S3_IN: CONN1.5 U1.18 | length 489
  Top Layer w8: v1@432,366 473,366 485,378 508.94,378 526.5,360.44 526.5,292.5 589.68,229.32 CONN1.5 ; v1@439.58,358.15 cw(c458.53,339.2) 458.53,366 ; v1@439.58,372.29 ccw(c454.77,387.48) 454.77,366 ; CONN1.5@584.16,215.33 ccw(c570.83,228.66) 589.68,228.66 ccw(c608.54,228.66) CONN1.5@595.21,215.33
  Bottom Layer w8: U1.18 406.57,391.16 v1(432.51,365.22) ; U1.18@402.75,389.94 cw(c402.75,377.78) 411.35,386.38 ; v1@422.51,365.22 ccw(c398.37,365.22) 415.44,382.29 ccw(c432.51,399.36) v1@432.51,375.22
S3_OUT: JP3.1 U1.43 | length 488
  Bottom Layer w10: U1.43 749.37,391.16 754.21,396 799,396 JP3.1@914,281 ; 859.96,335.04 ccw(c918,393.08) JP3.1@918,311 ; 864.79,330.21 cw(c813.57,279) JP3.1@886,279 ; 877.03,317.97 ccw(c918,358.94) JP3.1@918,301 ; 881.86,313.14 cw(c847.72,279) JP3.1@896,279 ; JP3.1@929,278 JP3.1@929,288
S4_IN: CONN1.6 U1.19 | length 490
  Top Layer w8: v1@454,392 514.74,392 543,363.74 543,301 629.05,214.95 CONN1.6 ; v1@468.07,387.93 cw(c477.9,378.1) 477.9,392 ; v1@468.07,402.07 ccw(c492.38,426.38) 492.38,392 ; 612.09,231.91 cw(c589.97,209.8) CONN1.6@621.24,209.8
  Bottom Layer w8: U1.19 438.16,410.84 ; v1@458.87,404.77 cw(c454.07,426.75) 438.16,410.84 ; v1(461,395) 454,395 438.16,410.84
S4_OUT: JP4.1 U1.29 | length 904.2
  PWR w8: v1@584,615 610,589 685,589 711,615 852,615 875,592 875,436 ; v1@585,607 cw(c585,590.1) 596.95,602.05 ; v1@595,617 ccw(c626.38,617) 604.19,594.81 ; 879.15,431.85 cw(c843.3,396) JP4.1@894,396 ; 887.71,423.29 ccw(c915.14,450.72) JP4.1@917.17,411.98 ; JP4.1@892.81,418.19 cw(c870.62,396) JP4.1@902,396 ; JP4.1@916.75,419.97 cw(c913.88,474.88) 875,436 ; JP4.1@932,392 919,392 875,436
  Bottom Layer w8: U1.29 501.47,593.48 522.99,615 582,615 584,617 v1(585,617) ; U1.29@502.69,591.65 cw(c510.05,591.65) 504.84,596.86 ; 556.03,615 ccw(c556.03,645.97) v1@577.93,624.07 ; 565.69,615 cw(c565.69,597.69) v1@577.93,609.93
S5_IN: CONN1.7 U1.10 | length 460.9
  Top Layer w8: v1@614.93,290.93 cw(c593.03,269.03) 624,269.03 ; 624,278.69 cw(c641.31,278.69) v1@629.07,290.93 ; v1@624,301 624,256 668.42,211.57 CONN1.7 ; 653.84,226.16 cw(c637.48,209.8) CONN1.7@660.61,209.8 ; 658.11,221.89 ccw(c668.42,232.2) CONN1.7@668.42,217.61
  Bottom Layer w8: U1.10@462,242 462,283 473,294 548.8,294 576.8,322 597.94,322 621.94,298 v1(622,298) ; 604.83,315.11 ccw(c622,332.28) v1@622,308 ; 604.97,314.97 cw(c588,298) v1@612,298
S5_OUT: JP5.1 U1.40 | length 411.1
  Bottom Layer w10: U1.40 690.66,450 872,450 ; JP5.1@886.27,491.89 cw(c836.56,485.44) 872,450 ; JP5.1@896.18,493.17 cw(c862.01,488.74) 886.38,464.38 cw(c910.74,440.01) JP5.1@915.17,474.18 ; JP5.1@913.89,464.27 ccw(c907.44,414.56) 872,450 ; JP5.1@929,493 915,493 872,450
S6_IN: CONN1.8 U1.11 | length 572.2
  Top Layer w8: v1@635,335 635,322 707.8,249.2 CONN1.8 ; v1@636,332 ccw(c662.56,332) 643.78,313.22 ; v1@644,332 ccw(c689.87,332) 657.44,299.56 ; CONN1.8@702.27,215.33 ccw(c688.94,228.66) 707.79,228.66 ccw(c726.65,228.66) CONN1.8@713.32,215.33
  Bottom Layer w8: U1.11 442.42,287.42 464,309 544,309 571,336 630,336 v1(634,332) ; 600.2,336 cw(c600.2,298.2) v1@626.93,324.93 ; v1@626.93,339.07 cw(c619.51,346.49) 619.51,336 cw(c619.51,317.51) v1@632.59,330.59
S6_OUT: JP6.1 U1.12 | length 1122.7
  PWR w8: v1@512.93,478.07 ccw(c493.44,497.56) 521,497.56 ; v1(520,471) 521,472 521,509 538,526 692,526 709,509 v1(750,509) ; 521,492.73 ccw(c541.73,492.73) v1@527.07,478.07 ; v1@742.93,501.93 ccw(c725.86,484.86) 725.86,509 ccw(c725.86,533.14) v1@742.93,516.07 ; v1@748.38,499.38 v1@749,500
  Bottom Layer w10: U1.12 422.73,315.73 446,339 446,343.36 520,417.36 v1(520,471) ; v1@513.64,464.64 cw(c498.27,449.27) 520,449.27 cw(c541.73,449.27) v1@526.36,464.64 ; v1(750,509) 751,508 834,508 JP6.1@919,593 ; v1@756.36,502.64 cw(c769.31,489.69) 769.31,508 ; v1@756.36,515.36 ccw(c774.14,533.14) 774.14,508 ; 860.54,534.54 ccw(c799.09,596) JP6.1@886,596 ; 870.2,544.2 cw(c918,496.4) JP6.1@918,564 ; 877.62,551.62 ccw(c833.23,596) JP6.1@896,596 ; 887.27,561.27 cw(c918,530.54) JP6.1@918,574 ; JP6.1@924,598 JP6.1@919,593 ; JP6.1@929,593 JP6.1@919,593
SCK: U1.15 U4.23 | length 229.3
  Top Layer w8: U4.23 283.47,343.53 v1@302,325 ; U4.23@256.91,341.49 cw(c261.82,336.59) 261.82,343.53 cw(c261.82,350.47) U4.23@256.91,345.56 ; 283.47,343.53 ccw(c299.47,359.52) v1@301.22,336.97 ; 286.34,340.66 cw(c272.69,327) v1@292,327
  Bottom Layer w8: v1(302,327) 307.1,332.1 U1.15 ; v1@303.41,325.59 cw(c319.15,309.85) 319.15,332.1 ; v1@309.07,319.93 cw(c338.46,290.54) U1.15@338.46,332.1
TO_REG: C2.1 C3.1 D1.3 U2.1 U2.3 | length 844.7
  Top Layer w25: D1.3@232,84.6 v2@232,113
  PWR w25: v3@50,45 164,45 228,109 v2@228,110
  Bottom Layer w19: C3.1@97.91,73.32 cw(c97.91,3.85) U2.3@147.03,52.97 ; C3.1@100.5,83.5 110,74 126,74 ; C3.1@105.05,75.64 cw(c114.57,62.57) 126,74 ; C3.1@109.88,87.56 ccw(c126,90.36) 126,74 ; U2.3@145.2,54.8 ccw(c157.11,66.72) U2.3@164.23,51.44 ; U2.3@156.21,68.66 cw(c144.92,92.91) 126,74 ; U2.3@160.89,55.81 ccw(c200.39,55.47) 172.46,27.54 ; 217.63,28.12 ccw(c189.92,55.83) U2.1@229.11,55.83 ; U2.1@235,57.35 235,45.5 217.04,27.54 172.46,27.54 ; 126,74 172.46,27.54
  Bottom Layer w20: C2.1 ccw(c87.88,93.38) v3@54.43,52.42 ; C2.1@35.91,87.87 cw(c46.3,69.88) 51.67,89.95 ; C2.1@38.88,93.38 cw(c38.88,38.25) C3.1@77.85,77.23 ; v3(50,47) 35,62 C2.1 C3.1@94.09,93.38
  other v2: 232,115
UART1_RX: U1.31 U6.4 | length 306
  Top Layer w8: v1@484.53,467.53 531.06,421 558,421 U6.4@561,424 ; v1@485,459 cw(c485,439.54) 498.76,453.3 ; v1@495,469 ccw(c523.83,469) 503.44,448.62 ; 550.86,421 ccw(c550.86,433.41) U6.4@559.63,424.63
  Bottom Layer w8: v1(485,469) 485,469.94 540.84,525.78 U1.31 ; v1@485,479 ccw(c485,500.87) 500.46,485.41 ; v1@495,469 cw(c521.41,469) 502.74,487.68 ; 536.31,521.26 ccw(c528.32,529.25) U1.31@539.63,529.25
UART1_TX: CONN2.3 U1.30 | length 355.8
  Top Layer w8: v1@484.5,503.5 504,523 613,523 625.32,510.68 ; v1@485,514 ccw(c485,538.14) 502.07,521.07 ccw(c519.14,504) v1@495,504 ; CONN2.3@619.96,498.28 ccw(c608.28,510.68) 625.32,510.68 ; CONN2.3 625.32,510.68 ; CONN2.3@630.67,498.28 cw(c642.35,510.68) 625.32,510.68
  Bottom Layer w8: v1@484,506 499.74,506 ; v1@493.38,509.45 ccw(c499.74,513.58) 499.74,506 ; v1@494.79,501.97 cw(c499.74,500.94) 499.74,506 ; 517.78,524.04 ccw(c512.58,529.25) U1.30@519.94,529.25 ; U1.30 521.16,527.41 499.74,506
  other v1: 485,504
UART3_RX: CONN3.4 R21.1 U1.22 | length 494.4
  Top Layer w8: R21.1 225.62,508 286,508 300.95,493.05 CONN3.4 ; R21.1@204,498.13 ccw(c204,526.49) 224.06,506.43 ; R21.1@206,483 R21.1@207,484 ; R21.1@213.78,488.35 cw(c232.64,488.35) 219.3,501.68 ; 287.29,506.71 cw(c273.17,492.6) CONN3.4@293.13,492.6 ; 288.39,505.61 ccw(c300.95,518.16) CONN3.4@300.95,500.41
  Top Layer w10: CONN3.4@296.13,450.38 cw(c284.5,438.75) 300.95,438.75 cw(c317.39,438.75) CONN3.4@305.76,450.38 ; CONN3.4@298.62,447.43 ccw(c317.4,452.46) v1@312.34,433.69 ; CONN3.4@300.95,444.45 ccw(c329.45,444.45) v1@309.29,424.29 ; CONN3.4@300.95,468.59 ccw(c353.59,468.59) v1@316.36,431.36 ; CONN3.4 300.95,435.05 309,427 315,427 v1@311.5,423.5
  Bottom Layer w8: v1@305.76,434.06 ccw(c299.72,447) 314,447 ; v1(310,425) 314,429 314,447 ; 314,439.49 ccw(c324.49,439.49) v1@317.07,432.07 ; 332.38,465.38 cw(c340.35,457.41) U1.22@340.35,468.68 ; U1.22 336.9,469.9 314,447
UART3_TX: CONN3.3 R20.1 U1.21 | length 607.2
  Top Layer w8: R20.1@158,545.37 ccw(c158,577.65) 180.82,554.82 ; R20.1@161,535 194,568 278,568 337,509 ; R20.1@167.78,535.59 cw(c182.72,535.59) 172.16,546.16 ; CONN3.3 340.32,498.68 337,502 337,509 ; CONN3.3@343.2,499.86 cw(c346.84,509) 337,509
  Top Layer w10: CONN3.3 340.32,451.68 362,430 ; CONN3.3@347.13,455.2 ccw(c372.05,455.2) 354.43,437.57 ; 364,430 433.04,430 451,447.96 v1@451,455
  Bottom Layer w10: U1.21 444.21,450.21 v1(451,457) ; 412.89,450.21 ccw(c412.89,495.11) v1@444.64,463.36 ; 437.03,450.21 ccw(c437.03,470.97) v1@451.71,456.29
V_BUS: CONN4.1 D1.2 R4.1 | length 913.6
  Top Layer w8: R4.1@742,321 730,309 730,273.06 794.5,208.56 v1@794.5,200.5 ; 774.49,228.56 ccw(c800,254.07) v1@800,218 ; 786.42,216.64 cw(c777.79,208) v1@790,208
  Top Layer w20: D1.2 v1@356.6,118.4
  PWR w18: v1@355,124 ccw(c355,140.9) 366.95,128.95 ; v1@357,119 370,132 428,132 434,126 511,126 565,72 724,72 800,148 v1@800,206
  PWR w19: v1@357,117 v1@357,119
  Bottom Layer w12: CONN4.1 751.18,185.18 770,204 v1@799,204 ; CONN4.1@753.55,178.13 cw(c776.28,178.13) 760.21,194.21
  other v1: 355,119 800,208
VCC: C4.1 C5.1 C28.2 C30.2 C34.2 C38.1 D2.2 D5.2 JP7.2 L1.2 R3.2 R17.1 R20.2 R21.2 R22.2 U1.1 U1.9 U1.24 U1.36 U1.48 U2.5 U6.5 U9.3 U9.7 U9.8 | length 2934.4
  Top Layer w10: R22.2 154.62,483.62 204.62,533.62 R21.2@209,533.62 ; R22.2@61.21,477.41 cw(c76.2,462.43) 76.2,483.62 cw(c76.2,504.82) R22.2@61.21,489.83 ; D2.2 116,100 146,130 206,130 L1.2@233.75,157.75 ; D2.2@111.5,114.68 ccw(c111.5,161.01) 144.25,128.25 ; D2.2@126.18,100 cw(c150.76,100) 133.38,117.38 ; 134.9,483.62 ccw(c134.9,507.51) R20.2@151.79,490.62 ; 138.71,483.62 cw(c138.71,465.11) R20.2@151.79,478.2 ; R20.2@158,497.13 ccw(c158,521.57) 175.29,504.29 ; R20.2@166.78,488.35 cw(c184.72,488.35) 172.04,501.04 ; 186.71,515.71 cw(c204,498.43) R21.2@204,522.87 ; 189.96,518.96 ccw(c177.28,531.65) R21.2@195.22,531.65 ; R21.2@209.38,533 210.38,532 258,532 v1@271,545 ; R21.2@210.21,525.45 cw(c226.03,509.62) 226.03,532 ; R21.2@210.21,537.86 ccw(c224.36,552.01) 224.36,532 ; 213.66,137.66 ccw(c184.31,167) L1.2@225.81,167 ; 219.7,143.7 cw(c240.5,122.91) L1.2@240.5,152.32 ; 236.2,532 ccw(c236.2,570.8) v1@263.64,543.36 ; U6.5@570.58,370.41 597.59,370.41 v1(601,367) ; U6.5@571.04,370.41 cw(c571.04,337.04) v1@594.64,360.64 ; U6.5@574.82,372.75 ccw(c580.46,378.39) 580.46,370.41
  Top Layer w15: D5.2 D5.2@112,564.5 ; L1.2@233.75,157.75 236.5,155 L1.2@246.5,155
  Top Layer w18: v1@96.46,445.54 ccw(c58.96,483.04) 112,483.04 ; v1@97.99,446.58 ccw(c88.62,468) 112,468 112,452 ; v1@100,440 112,452 ; v1@100,447 ccw(c100,463.9) 111.95,451.95 ; D5.2@103.94,557.44 cw(c84.48,537.99) 112,537.99 ; 112,540.42 cw(c136.08,540.42) D5.2@119.05,557.44 ; D5.2@112,564.5 112,452
  Top Layer w20: L1.2@247.34,160.15 cw(c283.19,124.3) v2@283.19,175 ; L1.2@248.5,175 v2@290,175 ; 270.69,175 ccw(c270.69,196.31) v2@285.76,181.24
  Bottom Layer w8: C4.1@295.91,145.18 ccw(c295.91,169.99) C4.1@313.45,152.45 ; C4.1@295.91,153.18 ccw(c295.91,197.3) 327.1,166.1 ; C4.1@305.56,135.53 cw(c327.36,135.53) C4.1@311.95,150.95 ; C4.1@308.47,152 313,152 356.13,195.13 473.13,195.13 482,204 U1.9@482,238 ; C4.1@313.56,135.53 cw(c354.68,135.53) 325.6,164.6 ; 475.07,197.07 ccw(c461.79,210.35) U1.9@480.57,210.35
  Bottom Layer w10: v1@268,544 296.62,542 ; v1@278.24,533.38 cw(c291.9,527.37) 292.94,542.26 ; 297.03,541.66 ccw(c301.41,546.88) C28.2@305.21,541.22 ; C28.2@309,520.87 cw(c309,494.93) 327.35,513.27 ; C28.2@313.82,530.74 cw(c340.99,503.57) 340.99,542 ; 324.62,516 ccw(c340.35,531.73) U1.24@340.35,509.48 ; 348.38,542 cw(c348.38,518.79) R17.1@364.79,535.2 ; 351.23,542 ccw(c351.23,561.18) R17.1@364.79,547.62 ; R17.1@365.62,542 296.62,542 ; U1.24 331.35,509.27 C28.2 296.62,542 ; v1@279.59,543.19 cw(c277.12,507.84) 303.86,531.09 ccw(c277.12,507.84) v1@279.59,543.19
  Bottom Layer w12: v1@264.34,531.34 cw(c250.69,517.69) 270,517.69 cw(c289.31,517.69) v1@275.66,531.34 ; v1@268,544 270,542 C38.1@270,498.62 ; 270,522.83 ccw(c294.27,522.83) C38.1@277.11,505.67 ; U1.1@638.71,242.1 cw(c650.53,230.29) 650.53,247 ; U1.1@642,247 693,247 ; 651.27,247 cw(c651.27,224.27) v1@667.34,240.34 ; 652.61,247 ccw(c652.61,308.83) C34.2@696.33,265.11 ; 656.1,247 ccw(c656.1,262.9) v1@667.34,251.66 ; v1@677,252.93 ccw(c688.8,273.37) C34.2@694.91,250.57 ; v1@678.66,251.66 ccw(c689.9,262.9) 689.9,247 ; v1@678.99,240.69 cw(c693,228.28) 693,247 ; v1@679.93,242 cw(c692.94,234.49) 689.05,249 ; v1@680.81,244.26 cw(c711.71,237.37) C34.2@694.73,264.09 ; v1@681.58,247 ccw(c681.58,279.86) C34.2@704.82,256.62 ; C34.2@695.14,258.62 cw(c685.64,254.36) 693,247 ; C34.2@709,263 693,247
  Bottom Layer w15: v1(100,442) 100,441 130,411 U9.3 ; v1@106.5,442 ccw(c124.61,442) 111.8,429.2 ; U9.7@180,552.49 U9.8@230,552.49 ; U9.7@183.05,561.03 ccw(c203.68,581.66) 203.68,552.49 ; 206.32,552.49 ccw(c206.32,581.66) U9.8@226.95,561.03 ; U9.8@228,498.62 C38.1@270,498.62 ; U9.8@233.05,491.94 cw(c249.17,475.82) 249.17,498.62 ; 260.18,498.62 cw(c260.18,484.8) C38.1@269.95,494.57 ; U1.36@643,560.45 680.93,560.45 C30.2 702.38,539 v1@737,539 ; 664.37,560.45 cw(c664.37,525.69) C30.2@688.95,550.27 ; C30.2@695.05,548.49 ccw(c717.96,571.4) 717.96,539 ; C34.2@705.27,264.05 ccw(c696.25,273.06) 709,273.06 ; C34.2@709,263 U1.48@709,289 ; 711.07,539 ccw(c711.07,564.93) v1@729.4,546.6 ; v1@730.1,547.2 ccw(c707.75,577) 745,577 745,547 v1@737,539 ; JP7.2@738.17,575.17 cw(c721.67,558.67) 745,558.67 ; v1@738.6,546.6 ccw(c756.93,564.93) 756.93,539 ; 745,563.5 cw(c761.5,563.5) JP7.2@749.83,575.17 ; 751.01,539 ccw(c751.01,564.4) R3.2@768.97,546.44 ; R3.2@772.38,539 v1@737,539
  other v1: 673,246 270,537 734,542
  other v2: 290,177
VCC_UNREG: CONN1.2 CONN2.2 CONN3.2 D1.1 JP1.2 JP2.2 JP3.2 JP4.2 JP5.2 JP6.2 | length 4203.9
  Top Layer w20: v2@271.65,25.21 cw(c310.4,-6.42) D1.1 275.6,43.6 ; v2@272.67,30.95 cw(c284.26,34.93) 275.6,43.6 ; v2@272.95,28.21 cw(c290.82,25.82) D1.1@281.8,41.43 ; D1.1@292.59,41.79 ccw(c290.58,1.42) 262,30 275.6,43.6 ; v3@320,570 380,510 CONN3.2@380,474.21 ; v3@327,572 ccw(c348.73,572) 333.36,556.64 ; 364.07,525.93 cw(c330.73,492.6) CONN3.2@377.87,492.6 ; CONN2.2 v3@664.69,619.69 ; 664.69,611.93 cw(c686.07,611.93) v3@670.95,627.05
  Top Layer w25: v2@386,101.5 ccw(c386,168.9) 433.66,121.24 ; v2@386.7,98.96 411.38,98.96 471.57,159.16 CONN1.2 ; 463.39,150.97 ccw(c441.96,172.4) CONN1.2@472.26,172.4 ; v3@664.69,619.69 664.69,627.69 v3@665,628
  Top Layer w60: JP1.2 JP2.2 JP3.2 JP4.2 JP5.2 JP6.2
  PWR w15: v3@320,570 396.5,646.5 974.5,646.5 ; v3@320,581.5 ccw(c320,609.26) 339.63,589.63 ; v3@329.5,572 cw(c347.61,572) 334.8,584.8 ; v3@662.11,635.89 cw(c687.73,610.27) 687.73,646.5 ; v3@672.72,625.28 cw(c723.94,574.06) 723.94,646.5 ; 979.59,641.41 ccw(c1018,679.82) JP6.2@1018,625.5 ; JP6.2@988.93,601.02 ccw(c937.85,609.84) 974.5,646.5 ; 994.97,626.03 cw(c972.75,603.81) JP6.2@1003.71,598.47 ; JP6.2@1025,596 974.5,646.5
  PWR w25: v2@268,30 972,30 JP1.2@1020,78 ; 386.7,38.7 v2@386.7,98.96 ; 974.05,32.05 ccw(c927.11,79) JP1.2@993.5,79 ; 981.3,39.3 cw(c1018,2.59) JP1.2@1018,54.5
  PWR w80: JP1.2 JP2.2 JP3.2 JP4.2 JP5.2 JP6.2
  Bottom Layer w60: JP1.2 JP2.2 JP3.2 JP4.2 JP5.2 JP6.2
  other v2: 267,29 386,98
  other v3: 320,572 666,632
pads on no net: CONN1.0 CONN2.0 CONN3.0 CONN4.4 U1.2 U1.4 U1.7 U1.34 U1.37 U1.38 U4.2 U4.3 U4.4 U4.5 U4.6 U4.7 U4.14 U4.15 U4.16 U4.17 U4.19 U4.21 U4.22

## Polygon pours and split planes (outlines as drawn)
GND on Top Layer "Top Layer - GND" (solid, remove dead copper, pour order 10): 0,2 1181.1,2 1181.1,667 0,667
GND on GND "GND Layer - GND" (solid, remove dead copper, pour order 12): 0,2 1181.1,2 1181.1,667 0,667
VCC on PWR "Pwr Layer - VCC" (solid, remove dead copper, pour order 14): 32,28 946,28 946,667 32,667
GND on Bottom Layer "Bottom Layer - GND" (solid, remove dead copper, pour order 16): 0,2 1181.1,2 1181.1,667 0,667

## Keep-outs
Keep-Out Layer:
  the board outline again, w6

## Other copper
PWR:
  rectangle net VCC_UNREG: 647,613 685,646
Bottom Layer:
  rectangle net VCC: 236,138 307,208
  pour cut-out: 398,139 398,7 483,7 483,139

## Silkscreen, mask and mechanical layers (free items; w line width, h text height)
Top Overlay:
  text "+" at 1009,642 h40
  text "-" at 1111,640 h65
  text "6" at 801,580 h65
  text "Main" at 772,569 h50 r270
  text "5" at 800.9,467 h65
  text "-" at 412,409 h65
  text "R" at 286,406 h50
  text "T" at 328,406 h50
  text "+" at 365,403 h65
  text "4" at 799.92,355 h65
  text "⚛" at 556,296 h140
  text "" at 431,289 h137.8 r90
  text "-" at 423,231 h65
  text "5" at 656.6,230.59 h50
  text "1" at 499,230 h50
  text "2" at 538.4,230 h50
  text "3" at 577.8,230.29 h50
  text "4" at 617.2,230 h50
  text "6" at 696,230.29 h50
  text "+" at 456,226 h65
  text "2" at 800.9,153 h65
  text "1" at 805.72,53 h65
  text "+" at 1010,2 h40
  text "-" at 1112,0 h65
Bottom Overlay:
  text "www.OpenPilot.org" at 625.27,612.73 h60
  text "B" at 801,611 h50
  text "+" at 721,522 h65